# Altium PCB RF_board.PcbDoc
Units mil, origin at the board's own origin, x right, y up, seen from the top; angles counter-clockwise.
Board outline 4160 x 4725 mil, 4 copper layers (915MHz_top, 915MHz_bottom, 433MHz_bottom, 433MHz_top), stack 38.2 mil thick; 76 components, 57 nets, 332 pads, 464 vias.
Unrouted connection lines stored in the file: 34.
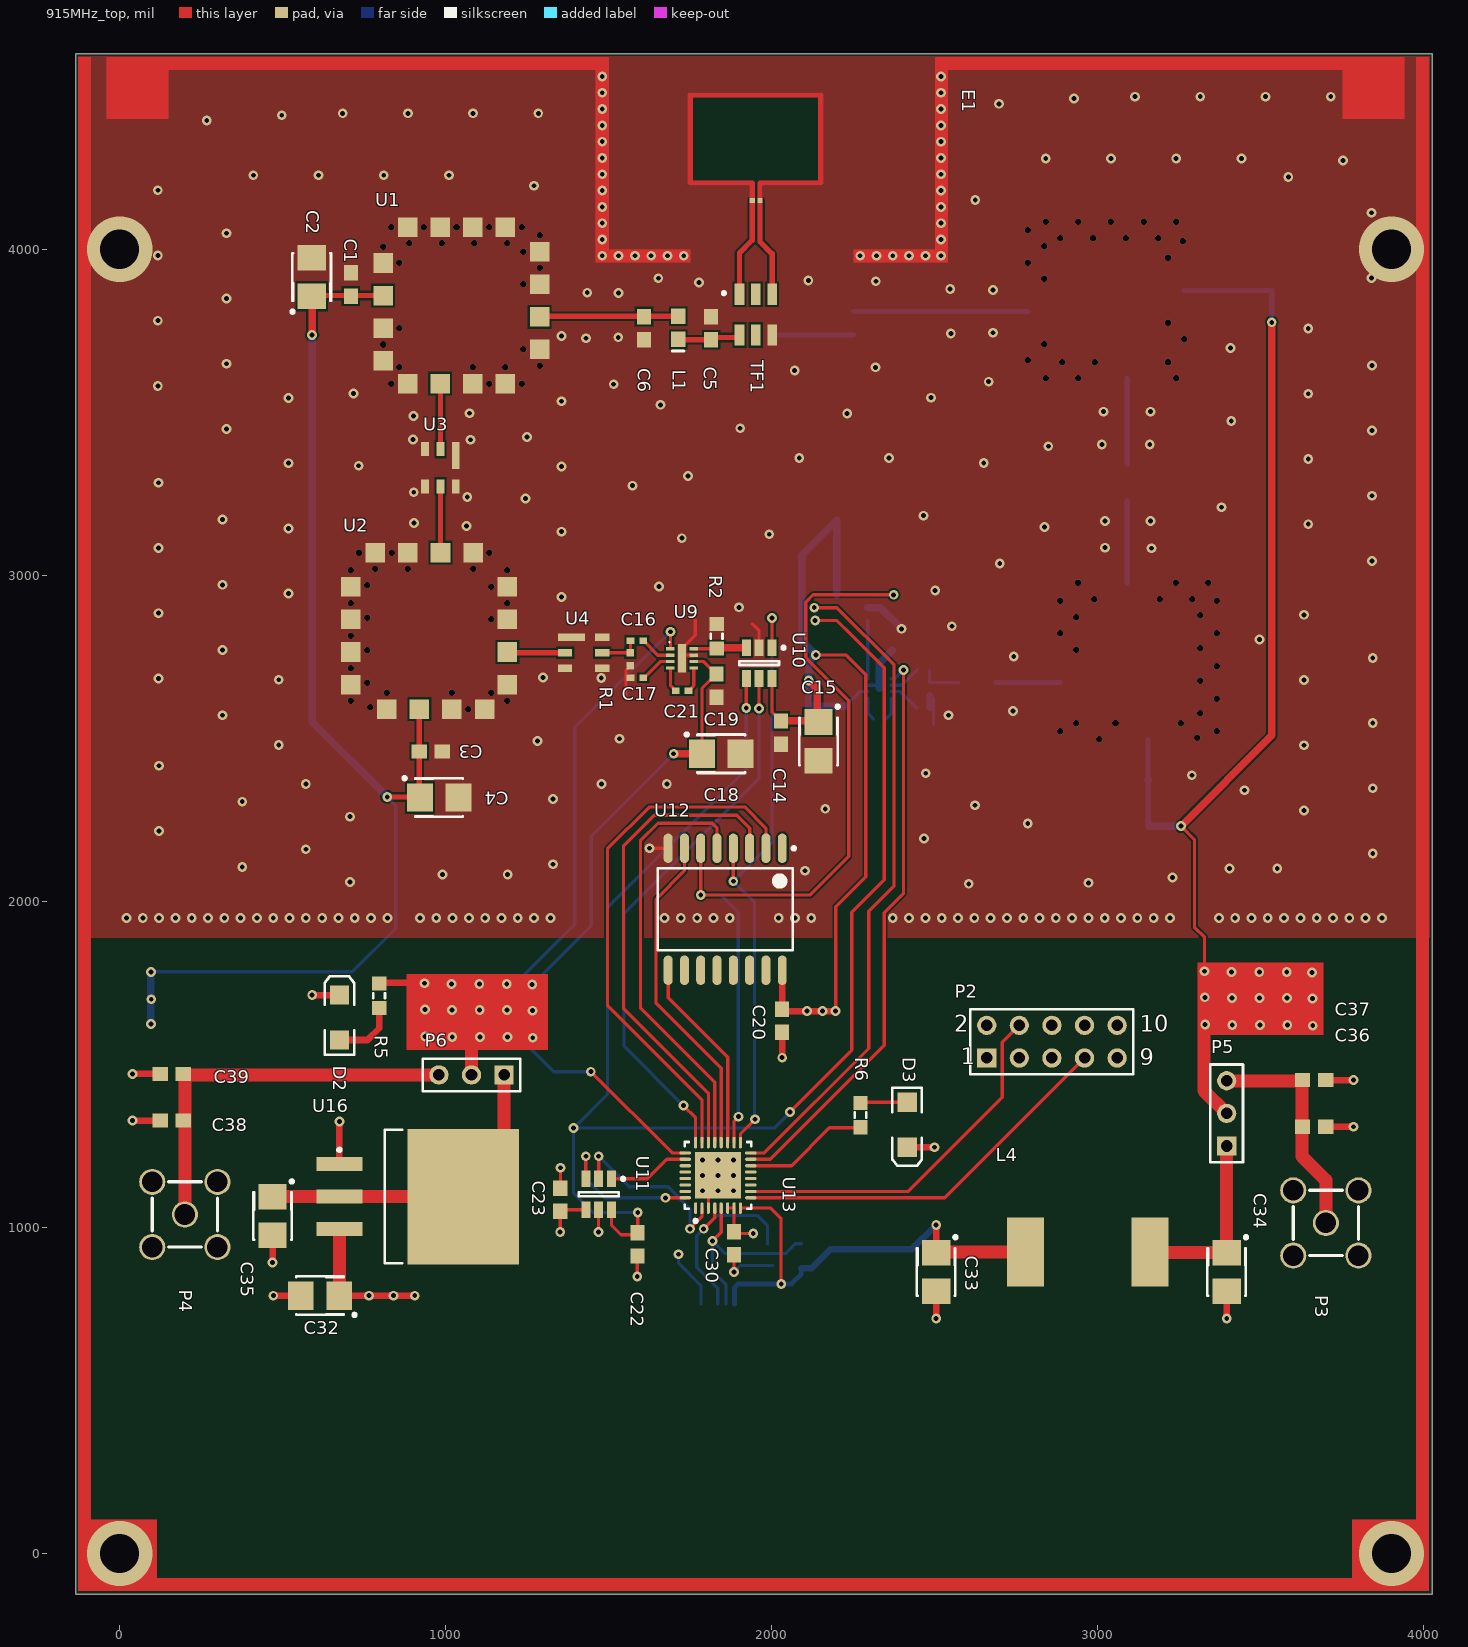
[diagram p0: 915MHz_top view]
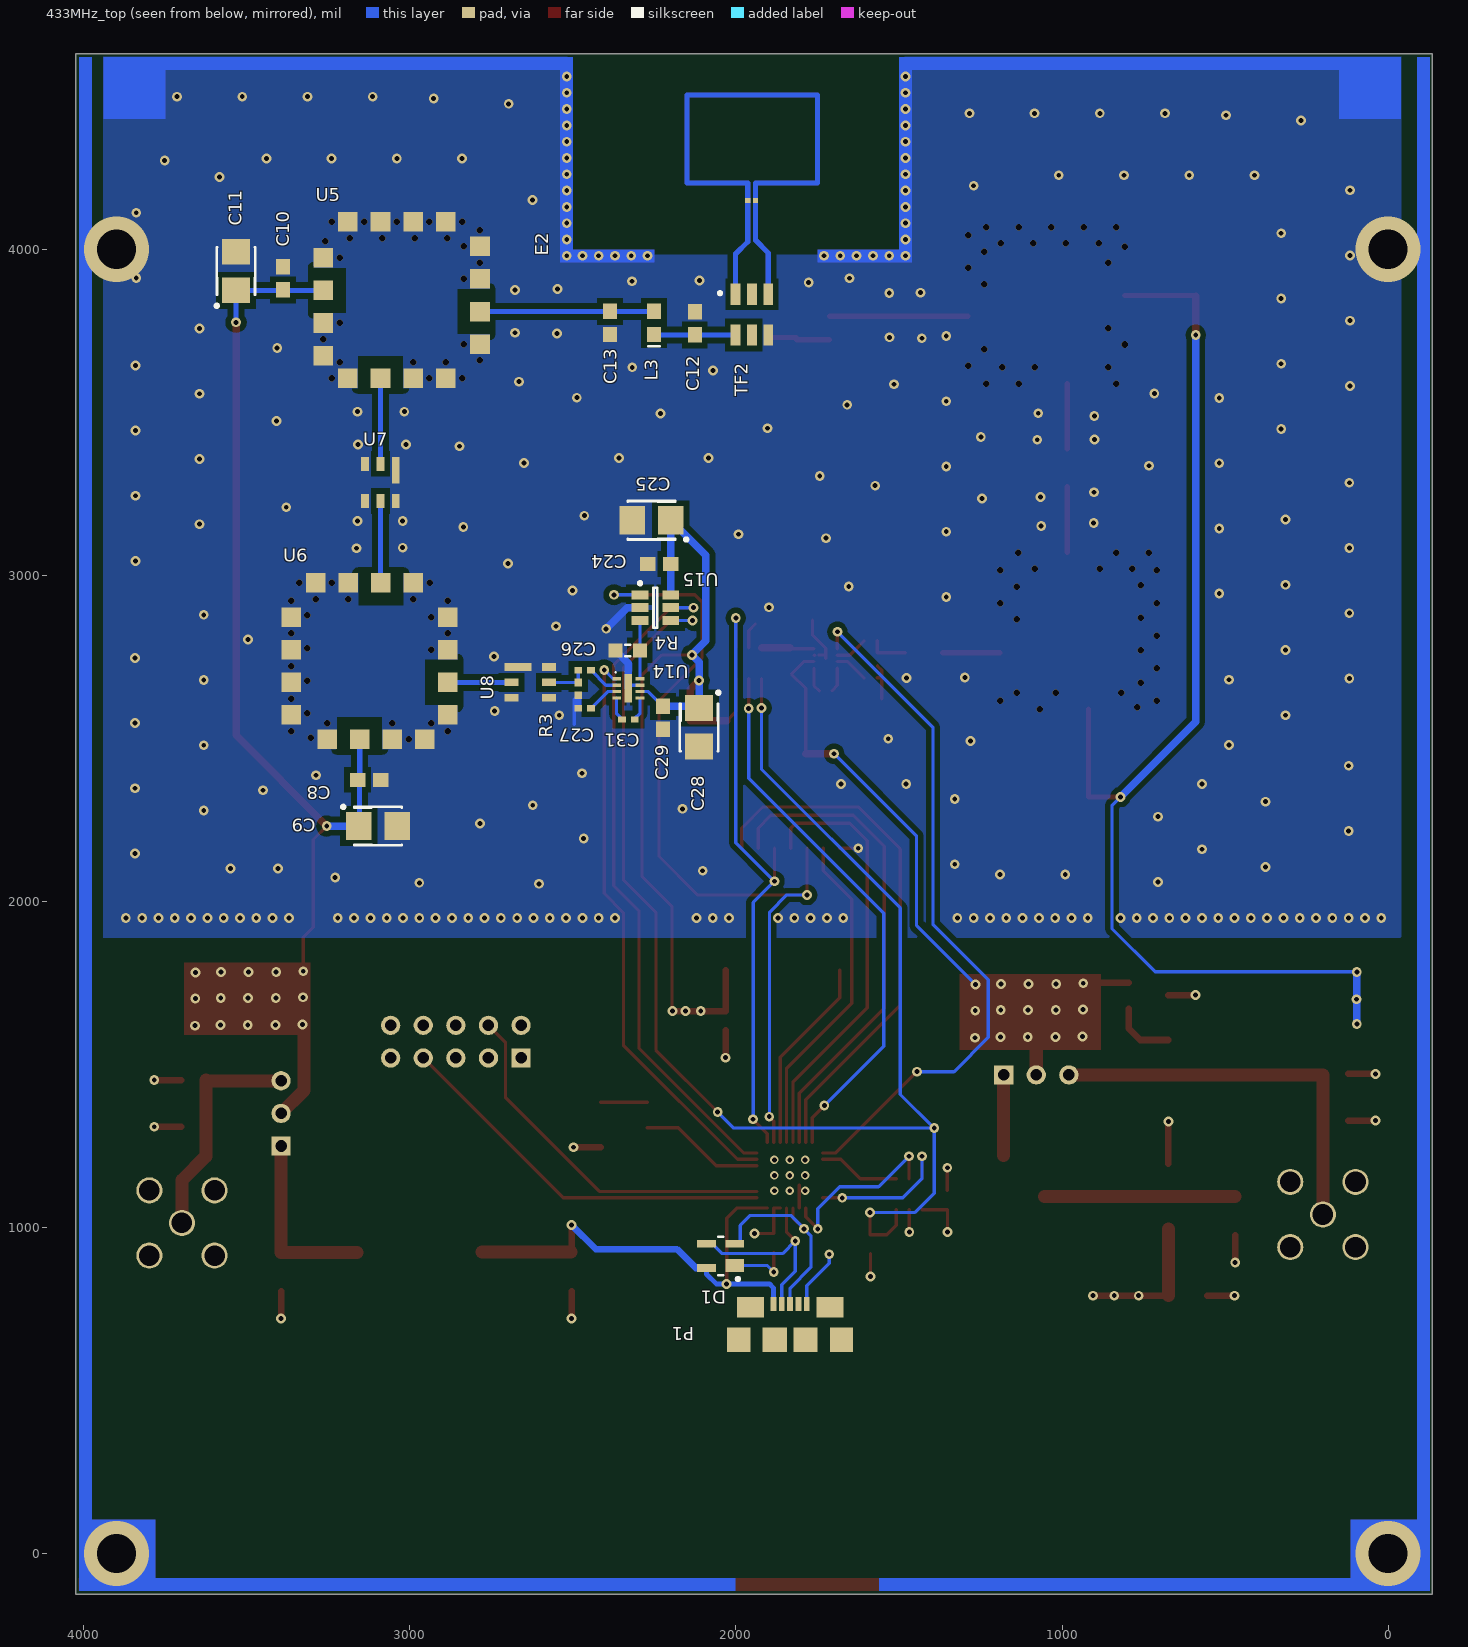
[diagram p1: 433MHz_top view, seen from below]
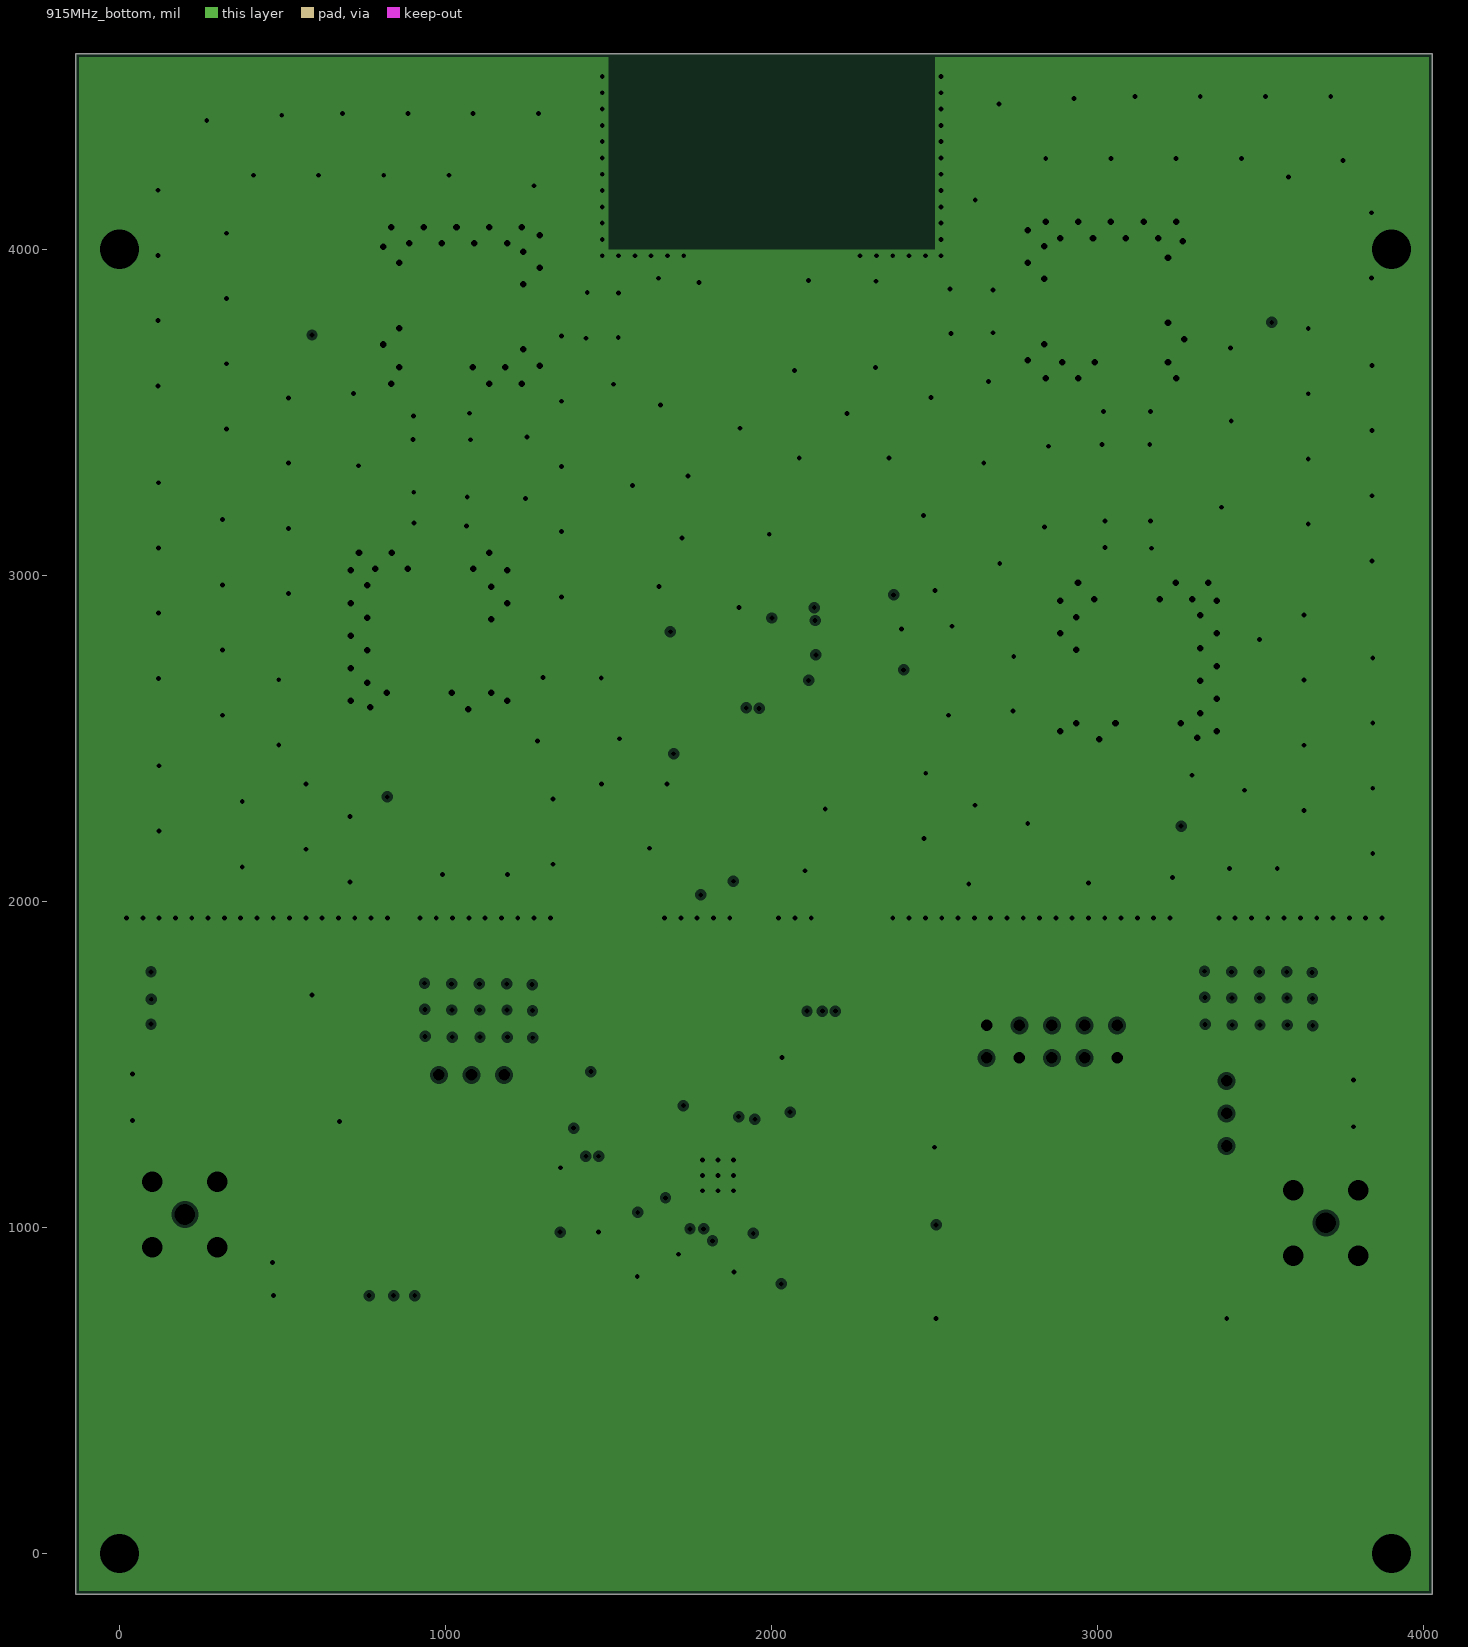
[diagram p2: 915MHz_bottom, clearances drawn from the general rule]
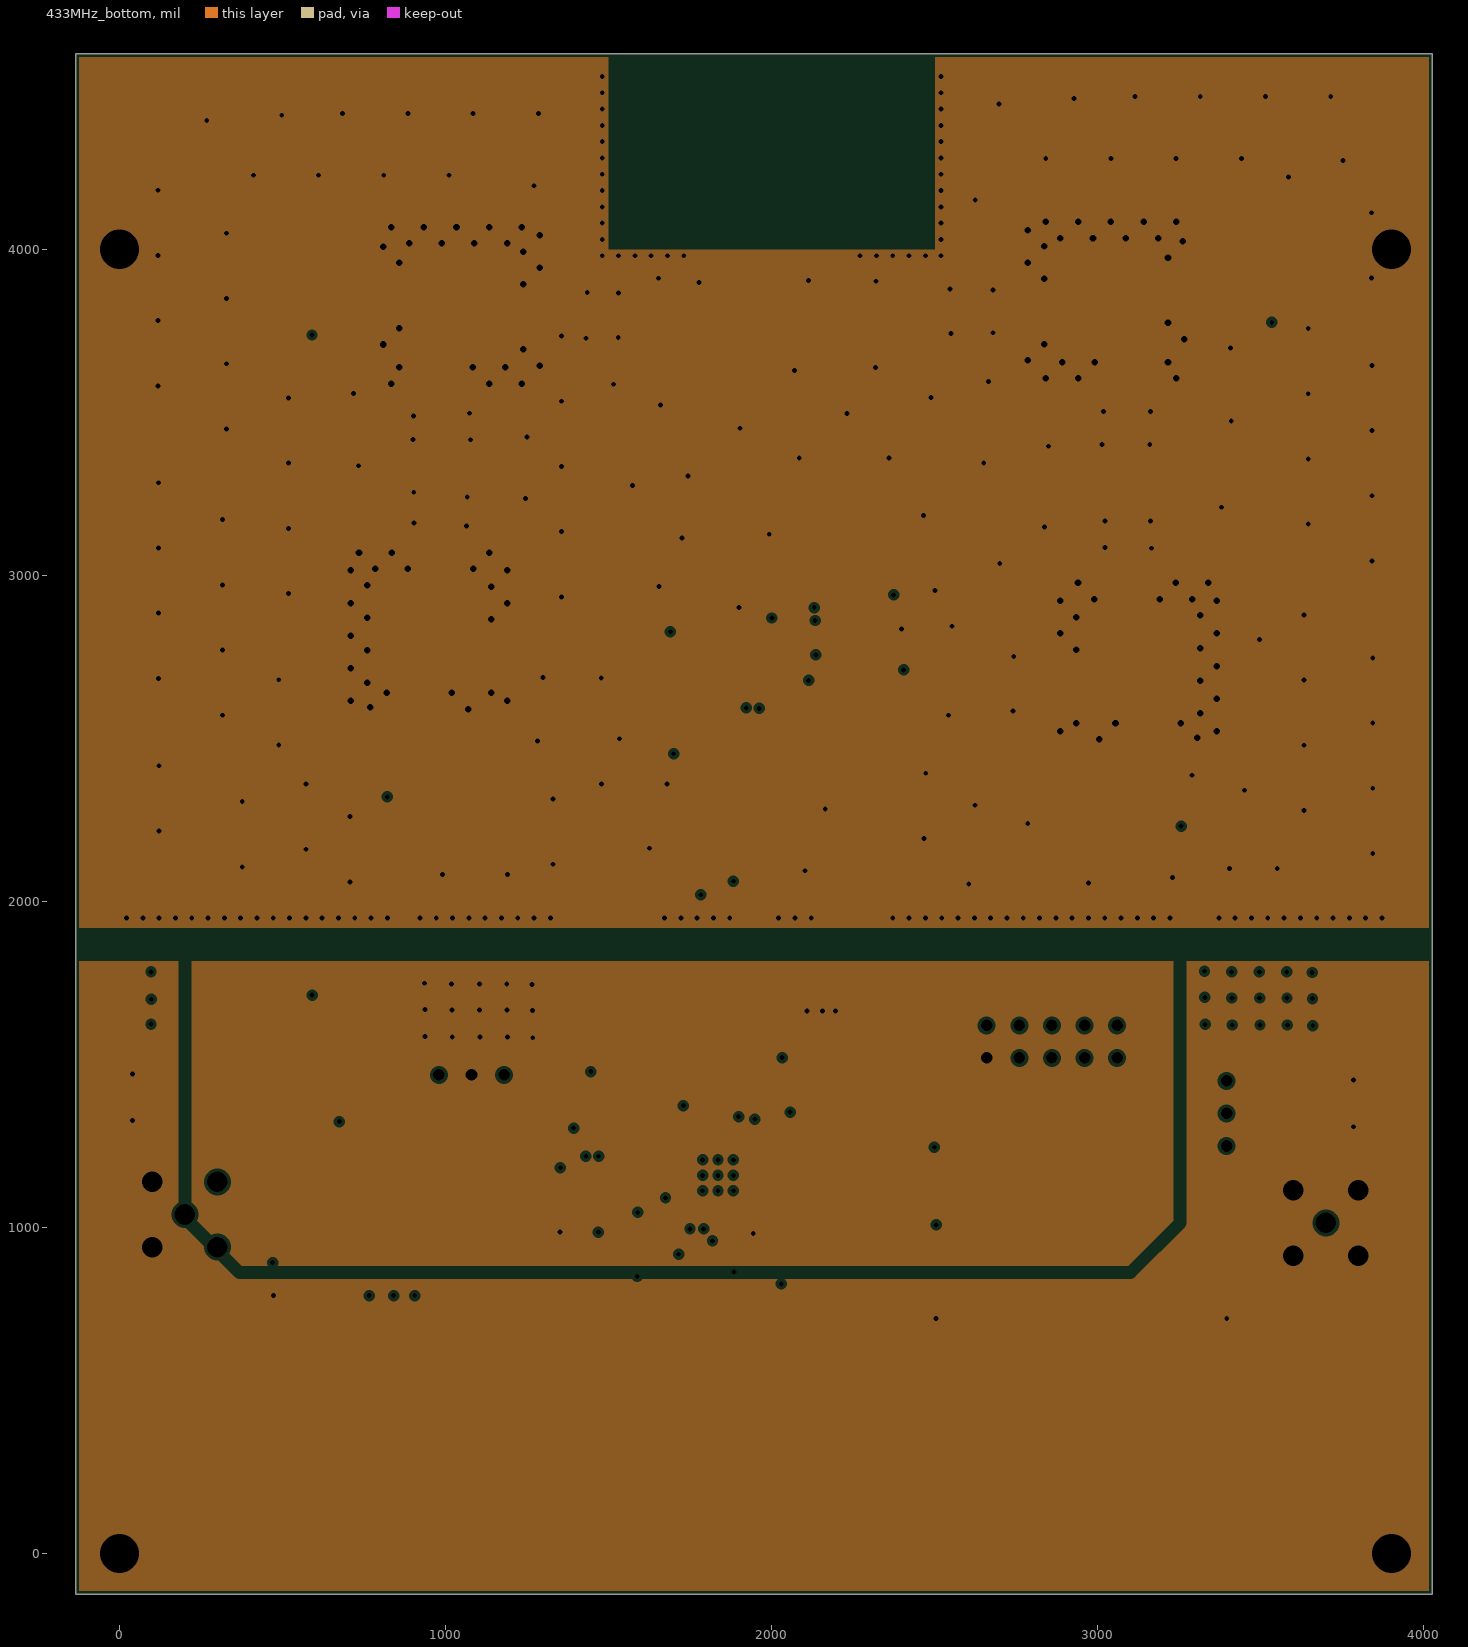
[diagram p3: 433MHz_bottom, clearances drawn from the general rule]

## Layer stack, top to bottom
915MHz_top: signal copper 1.4
Dielectric: core 10, Rogers 4350B, Dk 4.8
915MHz_bottom: plane copper 1.4, net GND
Dielectric: prepreg 12.6, FR-4, Dk 4.8
433MHz_bottom: plane copper 1.4, net (Multiple Nets)
Dielectric: core 10, Rogers 4350B, Dk 4.8
433MHz_top: signal copper 1.4

## Board outline
-135,-125 4025,-125 4025,4600 -135,4600

## Design rules (kind name [scope] priority, off if disabled: settings)
Clearance Antenna_Clearance [(InComponent('E1') OR InComponent('E2'))] p1: gap=0
Clearance [All] p2: gap=6
MinimumSolderMaskSliver [All] p1: minsoldermaskwidth=0
PlaneClearance [All] p1: clearance=10
PlaneConnect [All] p1: planeconnectstyle=Direct reliefexpansion=20 reliefentries=4 reliefconductorwidth=10 reliefairgap=10
PolygonConnect [InNet('GND')] p1: connectstyle=Direct reliefconductorwidth=10 reliefentries=4 polygonreliefangle="90 Angle" airgapwidth=10
RoomDefinition Microcontroller [InComponentClass('Microcontroller')] p1: confinementstyle=ConfineIn formatcopy=TRUE lockcomponents=FALSE outline 1345,-195 4125,-195 4125,4165 1345,4165
RoomDefinition "Analog Front End" [InComponentClass('Analog Front End')] p2: confinementstyle=ConfineIn formatcopy=TRUE lockcomponents=FALSE outline -225,-345 2605,-345 2605,4160 -225,4160
RoutingVias [All] p1: holewidth=28 width=50 viastyle="Through Hole" minholewidth=28 minwidth=50 maxholewidth=28 maxwidth=50
ShortCircuit Antenna_E2 [InNet('NetE2_1') vs InNet('NetE2_2')] p1: allowed=TRUE
ShortCircuit Antenna_E1 [InNet('NetE1_1') vs InNet('NetE1_2')] p2: allowed=TRUE
SilkToSilkClearance [All] p1: silktosilkclearance=2
SilkscreenOverComponentPads [All] p1: minsilkscreentomaskgap=2
SolderMaskExpansion [All] p1: expansion=4
Width [All] p1: maxlimit=40 minlimit=2 preferedwidth=10
22 further rules are at their usual default settings.

## Classes and differential pairs
component class Microcontroller: C14 C15 C16 C17 C18 C19 C20 C21 C22 C23 C24 C25 C26 C27 C28 C29 C30 C31 C32 C33 C34 C35 C36 C37 C38 C39 D1 D2 D3 L4 P1 P2 P3 P4 P5 P6 R1 R2 R3 R4 R5 R6 U9 U10 U11 U12 U13 U14 U15 U16
component class "Analog Front End": C1 C2 C3 C4 C5 C6 C8 C9 C10 C11 C12 C13 E1 E2 L1 L3 TF1 TF2 U1 U2 U3 U4 U5 U6 U7 U8

## Components (designator, comment, footprint, x,y, rotation, side; value= is the part's Value field where it differs from the comment)
C1 "Cap Semi" CAPC1608M 709,3892 r90 top
C2 "Cap Pol3" B 589,3915 r90 top
C3 "Cap Semi" CAPC1608M 954,2460 r0 top
C4 "Cap Pol3" B 980,2319 r0 top
C5 "GQM1885C2A2R2BB01D" CAPC1608M 1814,3758 r270 top
C6 "GQM1885C2A2R2BB01D" CAPC1608M 1608,3758 r90 top
C8 "Cap Semi" CAPC1608M 3125,2373 r180 bottom
C9 "Cap Pol3" B 3098,2231 r180 bottom
C10 "Cap Semi" CAPC1608M 3389,3911 r90 bottom
C11 "Cap Pol3" B 3533,3933 r90 bottom
C12 "GQM1885C1H150JB01D" CAPC1608M 2126,3773 r270 bottom
C13 "GQM1885C1H150JB01D" CAPC1608M 2386,3774 r90 bottom
C14 "Cap Semi" CAPC1608M 2028,2518 r90 top
C15 "Cap Pol3" B 2143,2491 r270 top
C16 "Cap Semi" CAPC1005L 1586,2799.81 r180 top
C17 "Cap Semi" CAPC1005L 1586,2685.81 r180 top
C18 "Cap Pol3" B 1845,2453 r0 top
C19 "Cap Semi" CAPC1608M 1830,2662 r270 top
C20 "Cap Semi" CAPC1608M 2031.69,1634 r90 top
C21 "Cap Semi" CAPC1005L 1725,2646 r180 top
C22 "Cap Semi" CAPC1608M 1588,948 r90 top
C23 "Cap Semi" CAPC1608M 1351,1085 r270 top
C24 "Cap Semi" CAPC1608M 2235,3035 r180 bottom
C25 "Cap Pol3" B 2259,3169 r0 bottom
C26 "Cap Semi" CAPC1005L 2464,2709 r0 bottom
C27 "Cap Semi" CAPC1005L 2464,2593 r0 bottom
C28 "Cap Pol3" B 2113,2534 r270 bottom
C29 "Cap Semi" CAPC1608M 2224,2563 r270 bottom
C30 "Cap Semi" CAPC1608M 1884,952 r90 top
C31 "Cap Semi" CAPC1005L 2330,2558 r0 bottom
C32 "Cap Pol3" B 614,791 r180 top
C33 "Cap Pol3" B 2504,864 r270 top
C34 "Cap Pol3" B 3395,864 r270 top
C35 "Cap Pol3" B 469,1035 r270 top
C36 "Cap Semi" CAPC1608M 3663,1309 r0 top
C37 "Cap Semi" CAPC1608M 3663,1452 r0 top
C38 "Cap Semi" CAPC1608M 160,1328 r180 top
C39 "Cap Semi" CAPC1608M 160,1471 r180 top
D1 "SP0503BAHT" SOT190P230X110-4M 2047,913 r0 bottom
D2 "LED2" 3.2X1.6X1.1 674,1644 r90 top
D3 "LED2" 3.2X1.6X1.1 2415,1315 r270 top
E1 "PCB Trace Antenna" "PCB Trace Antenna"#1 1950,4150 r270 top
E2 "PCB Trace Antenna" "PCB Trace Antenna"#2 1950,4150 r270 bottom
L1 "LQW18AN22NJ00D" INDC1608M 1713,3759 r90 top
L3 "LQW18AN12NJ00D" INDC1608M 2251,3774 r90 bottom
L4 "SRR1260" SRR1260 2778,925 r90 top
P1 "USB Mini" "Hirose - ZX62-B-5PA(11)" 1834,766 r90 bottom
P2 "Header 5X2" HDR2X5 2659,1520 r0 top
P3 "COAX-M" "SMA Connector" 3699,1014 r0 top
P4 "COAX-M" "SMA Connector" 200,1040 r270 top
P5 "Header 3" HDR1X3 3395,1250 r90 top
P6 "Header 3" HDR1X3 1179,1468 r180 top
R1 "Res3" RESC1005L 1566,2742.81 r90 top
R2 "Res3" RESC1608M 1831,2813 r270 top
R3 "Res3" RESC1005L 2484,2652 r90 bottom
R4 "Res3" RESC1608M 2332,2770 r180 bottom
R5 "Res3" RESC1608M 796,1711 r90 top
R6 "Res3" RESC1608M 2272,1345 r270 top
TF1 "TCM4-14+" TCM4-14+ 1901,3862 r0 top
TF2 "TCM4-14+" TCM4-14+ 2001,3862 r180 bottom
U1 "RAMP-33LN+" RAMP-33LN+ 1288,3693 r90 top
U2 "RAMP-33LN+" RAMP-33LN+ 1084,3070 r180 top
U3 "SAW Filter" "Epcos SAW Filter" 1031,3389 r180 top
U4 "SAW Filter" "Epcos SAW Filter" 1364,2810 r270 top
U5 "RAMP-33LN+" RAMP-33LN+ 2785,3709 r90 bottom
U6 "RAMP-33LN+" RAMP-33LN+ 2989,2977 r0 bottom
U7 "SAW Filter" "Epcos SAW Filter" 3043,3344 r0 bottom
U8 "SAW Filter" "Epcos SAW Filter" 2690,2719 r270 bottom
U9 "LT5537" "DDB Package" 1689,2775 r0 top
U10 "LT6230" SOT100P275-6M 1961,2731 r270 top
U11 "LTC2630" SOT100P275-6M 1469,1102 r270 top
U12 "MC14043BDG" SOIC127P1030-16AM 1857,1976 r270 top
U13 "C8051F342" QFN50P500X500-32VBM 1835,1160 r90 top
U14 "LT5537" "DDB Package" 2366,2683 r180 bottom
U15 "LT6230" SOT100P275-6M 2247,2901 r180 bottom
U16 "LT1086CM-3.3" TO254P1420-4AM 914,1095 r0 top

## Footprints (in the part's own frame and the unit in brackets; to place one, negate y for a bottom-side part, rotate by r counter-clockwise, add the part's x,y. Pads: shape width x height; smd on the part's side, far side on the other; paste and mask are expansions set on the pad)
3.2X1.6X1.1 [mm] "SMT LED; 2 Flat Leads"
  rect 1.5x1.5 smd: 1(-1.75,0) 2(1.75,0)
  silkscreen extent -2.9,-1.15 3.2,1.15
B [mm] "Capacitor, SM Tantalum; Body 3.5 x 2.8 mm (LxW typ)"
  rect 2x2.2 smd: 1(-1.5,0) 2(1.5,0)
  silkscreen extent -2.82,-1.5 1.85,1.62
CAPC1005L [mm] "Chip Capacitor, Body 1.0x0.5mm, IPC High Density"
  rect 0.6x0.5 smd: 1(-0.5,0) 2(0.5,0)
  body extent -0.55,-0.3 0.55,0.3, height 0.6
CAPC1608M [mm] "Chip Capacitor, Body 1.6x0.8mm, IPC Low Density"
  rect 1.2x1.1 smd: 1(-0.9,0) 2(0.9,0)
  body extent -0.87,-0.48 0.87,0.48, height 0.85
"DDB Package" [mm] "8-Lead Plastic DFN (3mm x 2mm)"
  rect 0.675x0.25 smd: 1(0,0) 2(0,-0.5) 3(0,-1) 4(0,-1.5) 5(1.825,-1.5) 6(1.825,-1) 7(1.825,-0.5) 8(1.825,0)
  rect 0.61x2.2 smd: 9(0.913,-0.75)
  silkscreen extent -0.1,0.48 -0.05,0.53
"Epcos SAW Filter" [mm] "3.0 x 3.0 x 1.1 mm3 SMT SAW Filter"
  rect 0.6x2.1 smd: 1(0,0.55)
  rect 0.6x1.1 smd: 2(1.2,0.05) 3(2.4,0.05) 4(2.4,2.95) 5(1.2,2.95) 6(0,2.95)
  body extent -0.3,0 2.7,3, height 1.14
HDR1X3 [mm] "Connector; Header; 3 Position"
  rect 1.5x1.5 hole 0.9: 1(0,0)
  round 1.5 hole 0.9: 2(2.54,0) 3(5.08,0)
  silkscreen extent -1.27,-1.27 6.35,1.27, body extent -1.27,-1.46 6.35,1.46, height 8.51
HDR2X5 [mm] "Connector; Header; 5x2 Position"
  rect 1.5x1.5 hole 0.9: 1(0,0)
  round 1.5 hole 0.9: 2(0,2.54) 3(2.54,0) 4(2.54,2.54) 5(5.08,0) 6(5.08,2.54) 7(7.62,0) 8(7.62,2.54) 9(10.16,0) 10(10.16,2.54)
  silkscreen extent -1.27,-1.27 11.43,3.81
"Hirose - ZX62-B-5PA(11)" [mm] "CONN RCPT MICRO USB B SMD R/A"
  rect 1.1x0.45 smd: 1(0,1.3) 2(0,0.65) 3(0,0) 4(0,-0.65) 5(0,-1.3)
  rect 1.9x1.8 smd: ""(-2.8,-4) ""(-2.8,4)
  rect 1.9x1.9 smd: ""(-2.8,-1.2) ""(-2.8,1.2)
  rect 1.6x2.1 smd: ""(-0.25,-3.1) ""(-0.25,3.1)
INDC1608M [mm] "Chip Inductor, Body 1.6x0.8mm, IPC Low Density"
  rect 1.2x1.1 smd: 1(-0.9,0) 2(0.9,0)
  silkscreen extent -1.8,-0.45 -1.8,0.45, body extent -0.87,-0.48 0.87,0.48, height 0.71
"PCB Trace Antenna"#1 [mil] "PCB Trace Antenna to be used for RF board"
  rect 16x16 smd: 1(0,14) 2(0,-10)
  915MHz_top lines w16: 0,-10 -53,-10 -53,-200 -323,-200 -323,200 -53,200 -53,14 0,14
"PCB Trace Antenna"#2 [mil] "PCB Trace Antenna to be used for RF board"
  rect 16x16 smd: 1(0,10) 2(0,-14)
  915MHz_top lines w16: 0,10 -53,10 -53,200 -323,200 -323,-200 -53,-200 -53,-14 0,-14
QFN50P500X500-32VBM [mm] "32-Pin Plastic Quad Flat No-Lead 0.5 mm Pitch"
  oval 0.9x0.25 smd: 1(-2.55,1.75) 2(-2.55,1.25) 3(-2.55,0.75) 4(-2.55,0.25) 5(-2.55,-0.25) 6(-2.55,-0.75) 7(-2.55,-1.25) 8(-2.55,-1.75) 17(2.55,-1.75) 18(2.55,-1.25) 19(2.55,-0.75) 20(2.55,-0.25) 21(2.55,0.25) 22(2.55,0.75) 23(2.55,1.25) 24(2.55,1.75)
  oval 0.25x0.9 smd: 9(-1.75,-2.55) 10(-1.25,-2.55) 11(-0.75,-2.55) 12(-0.25,-2.55) 13(0.25,-2.55) 14(0.75,-2.55) 15(1.25,-2.55) 16(1.75,-2.55) 25(1.75,2.55) 26(1.25,2.55) 27(0.75,2.55) 28(0.25,2.55) 29(-0.25,2.55) 30(-0.75,2.55) 31(-1.25,2.55) 32(-1.75,2.55)
  rect 3.6x3.6 smd: 33(0,0)
  silkscreen extent -3.67,-2.6 2.6,2.6, body extent -2.58,-2.58 2.58,2.58, height 1
RAMP-33LN+ [mil] "Mini-Circuits RAMP-33LN+ Low Noise Amplifier 50 to 3000 MHz"
  rect 60x60 smd: 1(0,0) 2(100,0) 3(200,0) 4(300,0) 5(375,105) 6(375,205) 7(375,305) 8(375,405) 9(265,480) 10(165,480) 11(65,480) 12(-35,480) 13(-105,405) 14(-105,305) 15(-105,205) 16(-105,105)
RESC1005L [mm] "Chip Resistor, Body 1.1x0.5mm, IPC High Density"
  rect 0.6x0.6 smd: 1(-0.5,0) 2(0.5,0)
  body extent -0.55,-0.3 0.55,0.3, height 0.4
RESC1608M [mm] "Chip Resistor, Body 1.6x0.8mm, IPC Low Density"
  rect 1.1x1.1 smd: 1(-0.95,0) 2(0.95,0)
  silkscreen extent -0.2,-0.45 0.2,0.45, body extent -0.85,-0.48 0.85,0.48, height 0.6
"SMA Connector" [mil] "Footprint taken from SAMTEC SMA"
  round 80 hole 63: 1(0,0) 2(-100,100) 3(100,100) 4(-100,-100) 5(100,-100)
  silkscreen extent -100,-100 100,100
SOIC127P1030-16AM [mm] "SOIC, 16-Leads, Body 10.3x7.5mm, Pitch 1.27mm, IPC Low Density"
  oval 2.3x0.7 smd: 1(-4.75,4.445) 2(-4.75,3.175) 3(-4.75,1.905) 4(-4.75,0.635) 5(-4.75,-0.635) 6(-4.75,-1.905) 7(-4.75,-3.175) 8(-4.75,-4.445) 9(4.75,-4.445) 10(4.75,-3.175) 11(4.75,-1.905) 12(4.75,-0.635) 13(4.75,0.635) 14(4.75,1.905) 15(4.75,3.175) 16(4.75,4.445)
  silkscreen extent -4.87,-5.25 3.2,5.47, body extent -3.8,-5.25 3.8,5.25, height 2.67
SOT100P275-6M [mm]
  rect 1.3x0.7 smd: 1(-1.2,1) 2(-1.2,0) 3(-1.2,-1) 4(1.2,-1) 5(1.2,0) 6(1.2,1)
  silkscreen extent -1.32,-1.55 0.15,2.03, body extent -0.9,-1.55 0.9,1.55
SOT190P230X110-4M [mm] "SOT143, 4-Leads, Body 2.9x1.3mm, Pitch 1.9mm, Lead Span 2.3mm, IPC Low Density"
  rect 1.45x1 smd: 1(-1.1,0.75)
  rect 1.45x0.6 smd: 2(-1.1,-0.95) 3(1.1,-0.95) 4(1.1,0.95)
  silkscreen extent -1.47,-1.5 0.2,1.92, body extent -0.7,-1.52 0.7,1.52, height 1.1
SRR1260 [mil] "Bourns - SRR1260 Series - Shielded SMD Power Inductors"
  rect 213x114 smd: 1(0,0) 2(0,-382)
  body extent -244,-435 248,57, height 248
TCM4-14+ [mil] "Mini-Circuits - Surface Mount RF Transformer"
  rect 30x65 smd: 1(-0.01,-0.01) 2(50,0) 3(100,0) 4(100.01,-124.99) 5(50.01,-124.99) 6(0,-125)
  silkscreen extent -53,-1 -44,8
TO254P1420-4AM [mm] "D2-PAK, 4-Leads, Body 8.6x10.2mm, Pitch 2.54mm, Lead Span 14.2mm, IPC Low Density"
  rect 3.6x1.1 smd: 1(-6.1,2.54) 2(-6.1,0) 3(-6.1,-2.54)
  rect 8.7x10.55 smd: 4(3.55,0)
  silkscreen extent -6.22,-5.2 -1.2,5.2, body extent -2.55,-5.2 6.34,5.2, height 4.64

## Part data
C1 C3 C8 C10 C14 C16 C17 C19 C20 C21 C22 C23 C24 C26 C27 C29 C30 C31 C36 C37 C38 C39: "Capacitor (Semiconductor SIM Model)"
C2 C4 C9 C11 C15 C18 C25 C28 C32 C33 C34 C35: "Polarized Capacitor (Surface Mount)"
C5 C6 C12 C13: library part "Cap Semi", "Capacitor (Semiconductor SIM Model)"
D1: "Littelfuse Inc - TVS AVAL DIODE ARRAY 3 CH SOT143"
D2 D3: "Typical RED, GREEN, YELLOW, AMBER GaAs LED"
L1 L3: library part Inductor, "Inductor"
L4: library part "Inductor Iron", "Magnetic-Core Inductor"
P1: "Hirose Electric Co Ltd - CONN RCPT MICRO USB B SMD R/A"
P2: "Header, 5-Pin, Dual row"
P3 P4: "RF Coaxial PCB Connector, MMCX; Thru-Hole, Vertical Mount Plug,  50 Ohm Impedance"
P5 P6: "3-pin, IDC Jumper"
R1 R2 R3 R4 R5 R6: "Resistor"
TF1 TF2: "Mini-Circuits Surface Mount RF Transformer"
U1 U2 U5 U6: "Mini-Circuits - RAMP-33LN+"
U9 U14: "Linear Technology - IC RF/IF LOG DETECTOR 8-DFN"
U10 U15: "Linear Technology - IC OP AMP 3.4MA 215MHZ SOT23-6"
U11: "Linear Technology - IC DAC 12BIT R-R SC70-6"
U12: "ON Semiconductor - IC LATCH R-S QUAD NOR 16SOIC"
U13: "Silicon Laboratories Inc - IC 8051 MCU 64K FLASH MEM 32-QFN"
U16: "Linear Technology - IC REG LDO 3.3V 3DD"

## Via types
v1: diameter 30, hole 15, 915MHz_top to 433MHz_top, tented both sides, 351 vias
v2: diameter 20, hole 20, 915MHz_top to 433MHz_top, tented both sides, 100 vias
v3: diameter 25.98, hole 15, 915MHz_top to 433MHz_top, tented top, 9 vias
v4: diameter 200, hole 120, 915MHz_top to 433MHz_top, 4 vias

## Nets (pads, with @x,y where several pads share a name; then routed paths per layer and width w, separated by ;. In a path a pad name is that pad's centre, name@x,y a point inside that pad or via, vN(x,y) a via of type N, cw(c..) or ccw(c..) an arc to the next point about the centre after c; other vN are vias at no path point)
433_DET_EN: U13.15 U14.1 | length 1779.1
  915MHz_top w10: U13.15 1995.21,1209.21 2345,1559 2345,1966 2404,2025 v1(2404,2710)
  433MHz_top w10: U14.1 2377,2683 v1(2404,2710)
433_EN: U13.16 U15.5 | length 2090.6
  915MHz_top w10: U13.16 1976.9,1228.9 2297,1549 2297,1970 2375,2048 2375,2120 2375,2725.76 2199.76,2901 v1(2130,2901)
  433MHz_top w10: v1(2130,2901) U15.5
915_DET_EN: U9.1 U13.25 | length 2143.1
  915MHz_top w10: v1(1445,1478) 1694.1,1228.9 U13.25 ; U9.1 v1(1689,2827)
  433MHz_top w10: v1(1445,1478) 1331,1478 1226,1583 1226,1760 1396,1930 1396,2534 v1(1689,2827)
915_EN: U10.5 U13.24 | length 1686.6
  915MHz_top w10: v1(1729,1374) 1766.1,1336.9 U13.24 ; v1@1961,2591 U10.5
  433MHz_top w10: v1(1729,1374) 1547,1556 1547,1964 1961,2378 v1(1961,2592)
+3.3V: C14.2 C15.1 C18.1 C19.1 C20.2 C23.2 C24.2 C25.1 C28.1 C29.1 C30.2 P2.1 P6.2 R5.2 U9.6 U10.6 U11.4 U12.16 U13.6 U13.7 U14.6 U15.6 | length 5049
  915MHz_top w10: v1(1351,986) C23.2@1351,1055.47 ; C23.2@1351.72,1054.76 U11.4 ; U9.6 1791.8,2735.63 C19.1 1785.94,2653.38 C18.1 ; U13.6 U13.7 C30.2@1884.21,981.74 ; C30.2@1884,981.53 1884.47,982 v1(1943,982) ; U10.6 2000.37,2581.06 C14.2 ; v1(2135,2756) 2227,2756 2288,2695 2288,2076 2196,1984 v1@2196,1663.84
  915MHz_top w20: R5.2@796,1750.37 v1@933.63,1750.37 ; U12.16 2032,1663.84 v1(2195,1663.84)
  915MHz_top w23: v1(1699,2453) C18.1 ; C14.2 2139.62,2553.43 2139.62,2651.38 v1(2113,2678)
  915MHz_top w40: P6.2 1079,1758
  433MHz_top w10: v1(1265,1745) 1446,1926 1446,2200 v1(1699,2453) ; C29.1 2269.2,2643.63 U14.6
  433MHz_top w23: C28.1 v1(2113,2678) 2113,2734 v1(2135,2756) 2092,2799 2092,3061.06 2199.76,3168.81 U15.6 ; C28.1@2118.38,2598.43 C29.1
  other v1: 1267,1582 1020,1584 1105,1584 1189,1584 937,1586 2108,1663.84 2155,1663.84 1266,1665 1019,1667 1104,1667 1188,1667 936,1669 1018,1747 1103,1747 1187,1747 935,1749
+5V: C1.1 C2.1 C3.1 C4.1 C8.1 C9.1 C10.1 C11.1 C32.1 P5.2 U1.10 U2.10 U5.10 U6.10 U16.3 | length 7347.2
  915MHz_top w10: v1(3255,2231) 3296,2190 3296,1921 3327,1890 v1(3327,1786)
  915MHz_top w16: C2.1@592,3858 U1.10 ; v1(820.58,2320.47) 918.53,2320.47 C3.1@918.53,2460 ; C3.1@919,2460.47 U2.10
  915MHz_top w20: C32.1 v1(905,791)
  915MHz_top w23: v1(589.94,3737.06) C2.1@589.94,3855.94 ; v1(3255,2231) 3533,2509 v1(3533,3776)
  915MHz_top w40: C32.1@673.84,791.79 U16.3 ; v1@3325,1776 3325,1420 P5.2
  433MHz_top w10: v1(96,1784) 714,1784 847,1917 847,2294.06 v1(820.58,2320.47)
  433MHz_top w16: C8.1@3154,2373.53 U6.10 ; C9.1@3154.53,2233.53 C8.1@3154.53,2373 ; U5.10@3265.06,3873.94 C11.1 v1(3533,3776)
  433MHz_top w23: v1(96,1624) v1(96,1784) ; v1(589.94,3737.06) 589.94,2551.11 v1(820.58,2320.47) ; C8.1@3154,2373.53 C8.1@3154.53,2373 ; C9.1 v1(3255,2231)
  other v1: 765,791 840,791 3659,1619 3412,1621 3497,1621 3581,1621 3329,1623 97,1700 3658,1702 3411,1704 3496,1704 3580,1704 3328,1706 3657,1782 3410,1784 3495,1784 3579,1784
AMPREF: C22.2 U10.4 U11.6 U15.4 | length 4738.5
  915MHz_top w10: U11.6 1508.37,1006.63 1537.47,977.53 C22.2@1588,977.53 ; C22.2@1588.72,976.81 v1(1588.72,1046.28) ; v1(1921.63,2593.63) U10.4 ; v1@2055,1354 2245.25,1544.25 2245.25,1966.25 2345,2066 2345,2716.39 2245.25,2816.14 2199.76,2861.63 v1@2128.63,2861.63
  433MHz_top w10: v1(1392,1305) 2007,1305 v1(2056,1354) ; v1(1588.72,1046.28) 1450.72,1046.28 1392,1105 1392,1304 1496,1408 1496,1980 1921.63,2405.63 v1(1921.63,2593.63) ; v1(2133,2861.63) U15.4
C2D: P2.4 U13.10 | length 1133.5
  915MHz_top w10: U13.10 2418.79,1110.79 2707,1399 2707,1568 P2.4
D+: D1.2 P1.3 U13.4 | length 628.2
  915MHz_top w10: v1(1791,996) 1825.16,1030.16 U13.4
  433MHz_top w10: v1@1795,996 v1(1791,996) ; P1.3 1834,814 1770,878 1770,975 v1(1791,996) ; D1.2@1986.6,950.4 1986.6,1006.4 1956,1037 1832,1037 v1(1791,996)
D-: D1.3 P1.2 U13.5 | length 623
  915MHz_top w10: v1(1818,959) 1844.84,985.84 U13.5
  433MHz_top w10: P1.2 1859.59,824.41 1818,866 v1(1818,959) 1857,920 2042,920 2072.4,950.4 D1.3
DAC_C\S\: U11.1 U13.26 | length 251.1
  915MHz_top w10: U11.1 1618.24,1149.24 1678.21,1209.21 U13.26
GND: C1.2 C2.2 C3.2 C4.2 C5.1 C6.1 C8.2 C9.2 C10.2 C11.2 C12.1 C13.1 C14.1 C15.2 C17.2 C18.2 C19.2 C20.1 C22.1 C23.1 C24.1 C25.2 C27.2 C28.2 C29.2 C30.1 C32.2 C33.2 C34.2 C35.2 C36.2 C37.2 C38.2 C39.2 D1.1 D2.2 D3.2 P1.5 P2.2 P2.3 P2.9 P3.2 P3.3 P3.4 P3.5 P4.2 P4.3 P4.4 P4.5 R1.1 R2.1 R3.1 R4.1 TF1.4 TF2.4 U1.1 U1.3 U1.4 U1.5 U1.6 U1.7 U1.8 U1.9 U1.11 U1.12 U1.13 U1.15 U1.16 U2.1 U2.3 U2.4 U2.5 U2.6 U2.7 U2.8 U2.9 U2.11 U2.12 U2.13 U2.15 U2.16 U3.1 U3.3 U3.4 U3.6 U4.1 U4.3 U4.4 U4.6 U5.1 U5.3 U5.4 U5.5 U5.6 U5.7 U5.8 U5.9 U5.11 U5.12 U5.13 U5.15 U5.16 U6.1 U6.3 U6.4 U6.5 U6.6 U6.7 U6.8 U6.9 U6.11 U6.12 U6.13 U6.15 U6.16 U7.1 U7.3 U7.4 U7.6 U8.1 U8.3 U8.4 U8.6 U9.7 U9.9 U10.2 U11.5 U12.8 U13.3 U13.33 U14.7 U14.9 U15.2 U16.1 | length 2512.6
  915MHz_top w10: C23.1@1351.72,1113.81 v1(1351.72,1183.28) ; v1(1468.28,986) U11.5@1468.28,1055.47 ; 1553,2622 1553,2685.81 ; R1.1 1566,2722 1553,2709 1553,2685.81 ; C17.2 1553,2685.81 ; v1(1587.28,849.72) C22.1@1587.28,919.19 ; v1(1625,2163) U12.8 ; U9.9 1724.93,2775.93 1765,2816 1765,2862 ; U9.7@1757.88,2755.32 U9.7 ; U13.3 U13.33@1805.47,1130.47 ; v1(1884,863.94) C30.1@1884,922.47 ; 1940,2851 1961,2830 U10.2
  915MHz_top w20: v1(39,1328) C38.2@122.6,1328 ; v1(39,1471) C39.2@122.6,1471 ; v1(469,892.35) C35.2 ; v1(471.35,791) C32.2 ; v1(590.4,1712.9) D2.2 ; U16.1 v1(673.84,1324.84) ; v1(2031.69,1520.87) C20.1@2031.69,1604.47 ; D3.2 v1(2498.6,1246.1) ; v1(2504,721.35) C33.2 ; v1(3395,721.35) C34.2 ; C36.2@3700.4,1309 v1(3784,1309) ; C37.2@3700.4,1452 v1(3784,1452)
  433MHz_top w10: v1(1714,918) 1714,890 1782.82,821.18 P1.5 ; v1(1884,863.94) 1903.53,883.47 D1.1 ; U14.7 U14.9@2320.23,2663.32 ; R3.1 2496.13,2620.19 2496.13,2543.16
  433MHz_top w20: C27.2@2484,2593.31 R3.1
  433MHz_top w23: U15.2 2333,2901 v1(2398,2836) ; U14.9 2330.07,2730.67 R4.1
  other v1: 21,1949 71,1949 121,1949 171,1949 221,1949 271,1949 321,1949 371,1949 421,1949 471,1949 521,1949 571,1949 621,1949 671,1949 721,1949 771,1949 821,1949 921,1949 971,1949 1021,1949 1071,1949 1121,1949 1171,1949 1221,1949 1271,1949 1321,1949 1671,1949 1721,1949 1771,1949 1821,1949 1871,1949 2021,1949 2071,1949 2121,1949 2371,1949 2421,1949 2471,1949 2521,1949 2571,1949 2621,1949 2671,1949 2721,1949 2771,1949 2821,1949 2871,1949 2921,1949 2971,1949 3021,1949 3071,1949 3121,1949 3171,1949 3221,1949 3371,1949 3421,1949 3471,1949 3521,1949 3571,1949 3621,1949 3671,1949 3721,1949 3771,1949 3821,1949 3871,1949 2604,2054 2971,2057 706,2060 3229,2073 990,2083 1190,2083 2102,2094 3404,2101 3550,2101 376,2106 1329,2114 3843,2147 571,2160 2467,2193 121,2216 2785,2239 706,2260 3632,2279 2164,2284 2623,2295 376,2306 1329,2314 3450,2341 3843,2347 571,2360 1478,2360 1678,2360 3288,2387 2472,2393 121,2416 3632,2479 488,2480 1281,2492 1533,2499 3843,2547 315,2571 2542,2571 2740,2584 3632,2679 488,2680 119,2684 1477,2685 1298,2687 3843,2747 2742,2751 315,2771 3496,2803 2552,2844 3632,2879 119,2884 1899,2902 1355,2934 518,2944 2501,2954 1654,2966 315,2971 2699,3036 3841,3044 3164,3083 119,3084 3022,3085 1724,3114 1992,3126 1355,3134 518,3144 2836,3148 1064,3151 3645,3157 903,3161 3022,3167 3161,3167 315,3171 2465,3183 3379,3209 1245,3236 1066,3240 3841,3244 902,3255 1573,3275 119,3284 1743,3305 1355,3334 733,3336 518,3344 2650,3345 3645,3357 2084,3360 2359,3360 2848,3396 3012,3401 3159,3401 1076,3416 900,3417 1249,3424 3841,3444 328,3449 1903,3451 3409,3473 901,3489 2231,3496 1073,3497 3017,3502 3161,3502 1659,3523 1355,3534 518,3544 2488,3545 3645,3557 717,3558 117,3581 1515,3586 2665,3594 2070,3628 2318,3638 3841,3644 328,3649 3407,3697 1430,3727 1529,3730 1355,3734 2549,3742 2678,3744 3645,3757 117,3781 328,3849 1530,3866 1434,3867 2678,3875 2547,3878 1777,3898 2319,3902 2112,3904 1652,3911 3839,3912 1480,3980 1530,3980 1580,3980 1630,3980 1680,3980 1730,3980 2271,3980 2321,3980 2371,3980 2421,3980 2471,3980 2519,3980 117,3981 1480,4030 2519,4030 328,4049 1480,4080 2519,4080 3839,4112 1480,4130 2519,4130 2624,4151 1480,4180 2519,4180 117,4181 1271,4195 3584,4222 410,4227 610,4227 810,4227 1010,4227 1480,4230 2519,4230 3752,4272 2840,4278 3040,4278 3240,4278 3440,4278 1480,4280 2519,4280 1480,4330 2519,4330 1480,4380 2519,4380 267,4395 497,4411 684,4417 884,4417 1084,4417 1284,4417 1480,4430 2519,4430 2697,4446 2927,4462 3114,4468 3314,4468 3514,4468 3714,4468 1480,4480 2519,4480 1480,4530 2519,4530
  other v2: 3004,2497 3304,2502 2884,2522 3364,2522 2934,2547 3054,2547 3254,2547 3314,2577 1069,2590 769,2595 709,2615 1189,2615 3364,2622 819,2640 1019,2640 1139,2640 759,2670 3314,2677 709,2715 3364,2722 759,2770 2934,2772 3314,2777 709,2815 2884,2822 3364,2822 1139,2865 759,2870 2934,2872 3314,2877 709,2915 1189,2915 2884,2922 3364,2922 2989,2927 3189,2927 3289,2927 1139,2965 759,2970 2939,2977 3239,2977 3339,2977 709,3015 1189,3015 784,3020 884,3020 1084,3020 734,3070 834,3070 1134,3070 833,3588 1133,3588 1233,3588 2840,3604 2940,3604 3240,3604 858,3638 1083,3638 1183,3638 1288,3643 2890,3654 2990,3654 3215,3654 2785,3659 1238,3693 808,3708 2835,3709 3265,3724 858,3758 3215,3774 1238,3893 2835,3909 1288,3943 858,3958 2785,3959 3215,3974 1238,3993 808,4008 2835,4009 888,4018 988,4018 1088,4018 1188,4018 3260,4024 2885,4034 2985,4034 3085,4034 3185,4034 1288,4043 2785,4059 833,4068 933,4068 1033,4068 1133,4068 1233,4068 2840,4084 2940,4084 3040,4084 3140,4084 3240,4084
  other v3: 1787.76,1112.76 1835,1112.76 1882.24,1112.76 1787.76,1160 1835,1160 1882.24,1160 1787.76,1207.24 1835,1207.24 1882.24,1207.24
  other v4: 0,0 3900,0 0,4000 3900,4000
LATCHEN: U12.5 U13.21 | length 1345.7
  915MHz_top w10: U13.21 1825.16,1445.84 1597,1674 1597,2186 1651,2240 1817,2240 1832,2225 U12.5
LATCHOUT0: U12.2 U13.23 | length 1649
  915MHz_top w10: U13.23 1785.79,1392.21 1496,1682 1496,2161 1625,2290 1917,2290 1982,2225 U12.2
LATCHOUT1: U12.9 U13.19 | length 604.2
  915MHz_top w10: U12.9 1682,1705 1864.53,1522.47 U13.19
LATCHRST0: U12.3 U13.22 | length 1521
  915MHz_top w10: U13.22 1805.47,1411.53 1545,1672 1545,2169 1640,2264 1893,2264 1932,2225 U12.3
LATCHRST1: U12.7 U13.20 | length 1021.4
  915MHz_top w10: U12.7 1732,2094 1645,2007 1645,1688 1844.84,1488.16 U13.20
LATCHSET0: U10.1 U12.4 U13.17 | length 1893.9
  915MHz_top w10: v1(1882,2062) U12.4 ; U13.17 1903.9,1287.9 v1@1947,1331 ; U10.1 v1(2000.37,2869.37)
  433MHz_top w10: v1@1947,1332 1947,1997 v1(1882,2062) 2000.37,2180.37 v1(2000.37,2869.37)
  other v1: 1948,1332
LATCHSET1: U12.6 U13.18 U15.1 | length 2686.7
  915MHz_top w10: U12.6 v1(1782,2020) 2118,2020 2236,2138 2236,2616 2104,2748 2104,2918 2126.37,2940.37 v1(2373.63,2940.37) ; U13.18 1884.21,1326.21 v1@1897,1339
  433MHz_top w10: v1(1782,2020) 1844,2020 1897,1967 v1@1897,1340 ; U15.1 v1(2373.63,2940.37)
  other v1: 1898,1340
MISO: U13.1
MOSI: U11.3 U13.32 | length 468
  915MHz_top w10: U11.3 v1(1429.63,1218.72) ; v1(1673.9,1091.1) U13.32
  433MHz_top w10: v1(1429.63,1218.72) 1429.63,1149.24 1487.77,1091.1 v1(1673.9,1091.1)
NetC5_2: C5.2 L1.1 TF1.6 | length 179.6
  915MHz_top w16: L1.1@1714,3722.57 C5.2 ; C5.2@1814,3729.57 TF1.6@1893.57,3729.57
NetC6_2: C6.2 L1.2 U1.2 | length 423.6
  915MHz_top w16: U1.2@1289.43,3794.43 L1.2
NetC12_2: C12.2 L3.1 TF2.6 | length 248.4
  433MHz_top w16: TF2.6 L3.1@2249.43,3737
NetC13_2: C13.2 L3.2 U5.2 | length 533.6
  433MHz_top w16: L3.2 C13.2 U5.2@2784.57,3809.43
NetC16_1: C16.1 U9.2 | length 100.4
  915MHz_top w10: C16.1@1606.68,2799 1650.37,2755.32 U9.2
NetC16_2: C16.2 R1.2 U4.5 | length 122.6
  915MHz_top w10: U4.5 R1.2@1565.74,2762.76 ; R1.2@1566.31,2762.81 C16.2
NetC17_1: C17.1 U9.3 | length 103.3
  915MHz_top w10: C17.1@1606.68,2685 1657.32,2735.63 U9.3
NetC21_1: C21.1 U9.5 | length 76.6
  915MHz_top w10: C21.1 1760.85,2662.17 U9.5
NetC21_2: C21.2 U9.4 | length 76.7
  915MHz_top w10: U9.4 1689,2662.31 C21.2
NetC26_1: C26.1 U14.2 | length 97.2
  433MHz_top w10: U14.2 2398.63,2663.32 C26.1
NetC26_2: C26.2 R3.2 U8.5 | length 126.8
  433MHz_top w10: R3.2@2483.69,2672 C26.2 ; R3.2 U8.5@2573.79,2671.69
NetC27_1: C27.1 U14.3 | length 99.3
  433MHz_top w10: U14.3 2393.68,2643.63 C27.1
NetC31_1: C31.1 U14.5 | length 71.1
  433MHz_top w10: U14.5 2294.15,2577.17 C31.1@2311.32,2560
NetC31_2: C31.2 U14.4 | length 70.3
  433MHz_top w10: C31.2@2350.69,2560 2366,2575.31 U14.4
NetC34_1: C34.1 L4.2 P5.1 | length 560
  915MHz_top w40: L4.2@3161.94,923.06 C34.1 P5.1
NetC35_1: C35.1 P6.1 U16.2 U16.4 | length 831.6
  915MHz_top w40: C35.1@469.94,1095 U16.2 U16.4 ; U16.4@1179,1220.24 P6.1
NetC36_1: C36.1 C37.1 P3.1 P5.3 | length 697
  915MHz_top w40: P5.3 C37.1@3623.6,1450 ; C37.1@3625.6,1452 3625.6,1309 3625.6,1218.4 3699,1145 P3.1
NetC38_1: C38.1 C39.1 P4.1 P6.3 | length 1207
  915MHz_top w40: P4.1 200,1468.4 P6.3@978.6,1468.4
NetD2_1: D2.1 R5.1 | length 197.5
  915MHz_top w20: D2.1 760.1,1575.1 796,1611 R5.1@796,1671.63
NetD3_1: D3.1 R6.1 | length 142.5
  915MHz_top w10: R6.1@2272,1384.37 D3.1@2414.53,1384.37
NetE1_1: E1.1 TF1.3 | length 303.3
  915MHz_top w16: E1.1 1964,4023 2001,3986 TF1.3
NetE1_2: E1.2 TF1.1 | length 304.2
  915MHz_top w16: TF1.1 1900.99,3988.99 1940,4028 E1.2
NetE2_1: E2.1 TF2.3 | length 304.2
  433MHz_top w16: TF2.3 1901,3989 1940,4028 E2.1
NetE2_2: E2.2 TF2.1 | length 303.3
  433MHz_top w16: E2.2 1964,4023 2001.01,3985.99 TF2.1
NetR2_2: R2.2 U9.8 U10.3 | length 157.5
  915MHz_top w10: U9.8 R2.2@1830.4,2775
  915MHz_top w23: R2.2@1833.65,2778.24 U10.3
NetR4_2: R4.2 U14.8 U15.3 | length 178.5
  433MHz_top w10: U14.8 U15.3@2294.15,2861.54
NetU1_14: U1.14 U3.2 | length 200.7
  915MHz_top w16: U3.2@984,3387.28 U1.14@984,3588
NetU2_2: U2.2 U3.5 | length 202.6
  915MHz_top w16: U2.2@983.76,3070.24 U3.5
NetU2_14: U2.14 U4.2 | length 174.7
  915MHz_top w16: U2.14@1191.24,2762.76 U4.2
NetU5_14: U5.14 U7.2 | length 261.7
  433MHz_top w16: U7.2@3090,3342.28 U5.14
NetU6_2: U6.2 U7.5 | length 250.9
  433MHz_top w16: U6.2@3090.24,2977 U7.5
NetU6_14: U6.14 U8.2 | length 195.7
  433MHz_top w16: U8.2 U6.14@2883.76,2671.76
P2.4: R6.2 U13.14 | length 384.7
  915MHz_top w10: U13.14 2060.53,1189.53 2176.63,1305.63 R6.2@2272,1305.63
R\S\T\/C2CK: P2.7 U13.9 | length 1201.3
  915MHz_top w10: U13.9 2530.1,1091.1 P2.7
SCLK: U11.2 U13.2 | length 556.9
  915MHz_top w10: U11.2 v1(1469,1218.72) ; v1(1749,996) 1785.79,1032.79 U13.2
  433MHz_top w10: v1(1469,1218.72) 1562.72,1125 1682,1125 1749,1058 v1(1749,996)
VBUS: C33.1 D1.4 L4.1 P1.1 U13.8 | length 1450.5
  915MHz_top w10: U13.8 1997.39,1059.61 2028,1029 v1@2028,827
  915MHz_top w20: C33.1@2504,926.94 v1(2504,1008)
  915MHz_top w40: C33.1@2505.94,925 L4.1
  433MHz_top w15: P1.1 1885.18,815.18 1897,827 2060,827 2090.31,857.31 D1.4
  433MHz_top w20: D1.4 2122.6,875.6 2181,934 2430,934 v1(2504,1008)
  other v1: 2029,827
pads on no net: P1. P1.4 P2.5 P2.6 P2.8 P2.10 TF1.2 TF1.5 TF2.2 TF2.5 U12.1 U12.10 U12.11 U12.12 U12.13 U12.14 U12.15 U13.11 U13.12 U13.13 U13.27 U13.28 U13.29 U13.30 U13.31

## Polygon pours and split planes (outlines as drawn)
GND on 915MHz_top "top_rf_pour" (solid, remove dead copper, pour order 15): -127,4592 4017,4592 4017,1888 -127,1888
GND on 915MHz_top "u1_pour" (solid, pour order 14): 679,2560 849,2560 849,2660 989,2660 989,2560 1219,2560 1219,2695 1119,2695 1119,2835 1219,2835 1219,3100 1054,3100 1054,3000 914,3000 914,3100 679,3100
GND on 915MHz_top "u1_pour" (solid, pour order 16): 778,4098 778,3928 878,3928 878,3788 778,3788 778,3558 913,3558 913,3658 1053,3658 1053,3558 1318,3558 1318,3723 1218,3723 1218,3863 1318,3863 1318,4098
GND on 433MHz_top "top_rf_pour" (solid, remove dead copper, pour order 8): -39.91,4589.91 3939.91,4589.91 3939.91,1888.09 3940,1888 -40,1888
GND on 433MHz_top "u1_pour" (solid, pour order 12): 3394,2467 3224,2467 3224,2567 3084,2567 3084,2467 2854,2467 2854,2602 2954,2602 2954,2742 2854,2742 2854,3007 3019,3007 3019,2907 3159,2907 3159,3007 3394,3007
GND on 433MHz_top "u1_pour" (solid, pour order 13): 3295,4114 3295,3944 3195,3944 3195,3804 3295,3804 3295,3574 3160,3574 3160,3674 3020,3674 3020,3574 2755,3574 2755,3739 2855,3739 2855,3879 2755,3879 2755,4114
GND on 915MHz_bottom (split plane): 4014.91,-114.91 -124.91,-114.91 -124.91,4589.91 1500,4589.91 1500,4000 2500,4000 2500,4589.91 4014.91,4589.91
+3.3V on 433MHz_bottom (split plane): 3231.9,1022.32 3091.68,882.1 375.32,882.1 219.86,1037.56 220.1,1040 220.1,1817.92 3231.9,1817.92
GND on 433MHz_bottom (split plane): 4014.91,-114.91 -124.91,-114.91 -124.91,1818 -66.4,1818 -65,1817.92 179.9,1817.92 179.9,1040 180.29,1036.08 181.43,1032.31 183.29,1028.83 184.17,1027.76 183.9,1025 184.29,1021.08 185.43,1017.31 187.29,1013.83 189.79,1010.79 352.79,847.79 355.83,845.29 359.31,843.43 363.08,842.29 367,841.9 3100,841.9 3103.92,842.29 3107.69,843.43 3111.17,845.29 3114.21,847.79 3266.21,999.79 3268.71,1002.83 3270.57,1006.31 3271.71,1010.08 3272.1,1014 3272.1,1817.92 3978,1817.92 3979.4,1818 4014.91,1818
GND on 433MHz_bottom (split plane): 4014.91,1918.08 -65,1918.08 -66.4,1918 -124.91,1918 -124.91,4589.91 1500,4589.91 1500,4000 2500,4000 2500,4589.91 4014.91,4589.91

## Other copper
915MHz_top:
  region net GND: 4010,-105 4010,105 3780,105 3780,-105
  region net +3.3V: 880,1778 880,1545 1314,1545 1314,1778
  region net +5V: 3305,1813 3305,1591 3692,1591 3692,1813
  region net GND: 2250,4000 2250,3960 2540,3960 2540,4000
  region net GND: 1460,4000 1460,3960 1750,3960 1750,4000
  region net GND: 2500,4589.91 2500,4000 2540,4000 2540,4589.91
  region net GND: 1460,4589.91 1460,4000 1500,4000 1500,4589.91
  region net GND: -39.91,4589.91 -39.91,4550 1500,4550 1500,4589.91
  region net GND: 2500,4589.91 2500,4550 3939.91,4550 3939.91,4589.91
  region net GND: 3975,4590 3975,-115 4015,-115 4015,4590
  region net GND: -88.91,-75 -88.91,-115 4016,-115 4016,-75
  region net GND: -127.91,4589.91 -127.91,-115 -88,-115 -88,4589.91
  region net GND: 3750,4590 3750,4400 3940,4400 3940,4590
  region net GND: 115,-105 115,105 -115,105 -115,-105
  region net GND: -40,4590 -40,4400 150,4400 150,4590
  region net GND: 1721,2760 1721,2751 1750,2751 1750,2760
433MHz_top:
  region net GND: 4010,-105 4010,105 3780,105 3780,-105
  region net GND: -40,4590 -40,4400 150,4400 150,4590
  region net GND: 115,-105 115,105 -115,105 -115,-105
  region net GND: 3750,4590 3750,4400 3940,4400 3940,4590
  region net GND: -127.91,4589.91 -127.91,-115 -88,-115 -88,4589.91
  region net GND: -88.91,-75 -88.91,-115 1561,-115 1561,-75
  region net GND: 3975,4590 3975,-115 4015,-115 4015,4590
  region net GND: 2500,4589.91 2500,4550 3939.91,4550 3939.91,4589.91
  region net GND: -39.91,4589.91 -39.91,4550 1500,4550 1500,4589.91
  region net GND: 1460,4589.91 1460,4000 1500,4000 1500,4589.91
  region net GND: 2500,4589.91 2500,4000 2540,4000 2540,4589.91
  region net GND: 1460,4000 1460,3960 1750,3960 1750,4000
  region net GND: 2250,4000 2250,3960 2540,3960 2540,4000
  region net GND: 2001,-75 2001,-115 4015,-115 4015,-75
915MHz_bottom (plane layer: these items are gaps in the copper):
  region: 1500,4589.91 1500,4000 2500,4000 2500,4589.91
433MHz_bottom (plane layer: these items are gaps in the copper):
  region: 3973,1918.08 3973,1818 4022,1818 4022,1918.08
  region: -130,1918 -130,1818 -52,1818 -52,1918
  region: 1500,4589.91 1500,4000 2500,4000 2500,4589.91
  lines w40: 200,1040 200,1867 ; 204,1025 367,862 3100,862 3252,1014 3252,1867
  lines w100: -65,1868 3978,1868

## Silkscreen, mask and mechanical layers (free items; w line width, h text height)
Top Solder:
  region: 4010,-105 4010,105 3780,105 3780,-105
  region: 1460,4589.91 1460,3960 2500,3960 2500,4589.91
  region: -40,4590 -40,4400 150,4400 150,4590
  region: 115,-105 115,105 -115,105 -115,-105
  region: 3750,4590 3750,4400 3940,4400 3940,4590
  region: -127.91,4589.91 -127.91,-115 -88,-115 -88,4589.91
  region: -88.91,-75 -88.91,-115 4015,-115 4015,-75
  region: 3975,4590 3975,-115 4015,-115 4015,4590
  region: 2500,4589.91 2500,4550 3939.91,4550 3939.91,4589.91
  region: -39.91,4589.91 -39.91,4550 1500,4550 1500,4589.91
  region: 1460,4589.91 1460,4000 1500,4000 1500,4589.91
  region: 2500,4589.91 2500,4000 2540,4000 2540,4589.91
  region: 1460,4000 1460,3960 1750,3960 1750,4000
  region: 2250,4000 2250,3960 2540,3960 2540,4000
Bottom Solder:
  region: 4010,-105 4010,105 3780,105 3780,-105
  region: 1460,4589.91 1460,3960 2500,3960 2500,4589.91
  region: -40,4590 -40,4400 150,4400 150,4590
  region: 115,-105 115,105 -115,105 -115,-105
  region: 3750,4590 3750,4400 3940,4400 3940,4590
  region: -127.91,4589.91 -127.91,-115 -88,-115 -88,4589.91
  region: 3975,4590 3975,-115 4015,-115 4015,4590
  region: 2500,4589.91 2500,4550 3939.91,4550 3939.91,4589.91
  region: -39.91,4589.91 -39.91,4550 1500,4550 1500,4589.91
  region: 1460,4589.91 1460,4000 1500,4000 1500,4589.91
  region: 2500,4589.91 2500,4000 2540,4000 2540,4589.91
  region: 1460,4000 1460,3960 1750,3960 1750,4000
  region: 2250,4000 2250,3960 2540,3960 2540,4000
  region: -88.91,-75 -88.91,-115 1561,-115 1561,-75
  region: 2001,-75 2001,-115 4016,-115 4016,-75
Board Shape:
  the board outline again, w16
Design Notes (Mech5):
  lines w20: 4117,3812 6427,3812
  text "FABRICATION NOTES" at 4172,3852 h120
  text "Board Notes" at 4167,3667 h80
  text "Size (x/y/z): 4000 mil x 4000 mil x 62 mil" at 4247,3542 h60
  text "Number of Holes: 505" at 4247,3447 h60
  text "Smallest Trace Width: 10 mil" at 4242,3337 h60
  text "Smallest Hole Size: 15 mil" at 4242,3232 h60
  text "Board Material & Stackup" at 4142,3012 h80
  text "Material: FR4" at 4247,2902 h60
  text "Finish: Pb-Free" at 4238,2795 h60
  text "Soldermask: Green LPI" at 4243,2695 h60
  text "Silkscreen: White" at 4243,2595 h60
  text "Copper: 1 oz. Cu" at 4243,2500 h60
  text "Stackup:" at 4238,2415 h60
  text "1. Top Layer: Routing (.gtl)" at 4317,2313 h60
  text "2. GND Plane: Plane - Negative (.gp1)" at 4310,2213 h60
  text "3. GND/Power Plane: Split Plane - Negative (.gp2)" at 4310,2098 h60
  text "4. Bottom Layer: Routing (.gbl)" at 4314,1994 h60

## Text inside footprints (layer, text, board x,y; h text height)
P2: Top Overlay "10" at 3128,1600 h50; Top Overlay "9" at 3128,1498 h50; Top Overlay "1" at 2579,1500 h50; Top Overlay "2" at 2559,1600 h50